# Altium PCB 2TO2.54_converter.PcbDoc
Units mm, origin at the board's own origin, x right, y up, seen from the top; angles counter-clockwise.
Board outline 10.54 x 16.13 mm, 2 copper layers (Top Layer, Bottom Layer); 2 components, 10 nets, 20 pads, 0 vias.
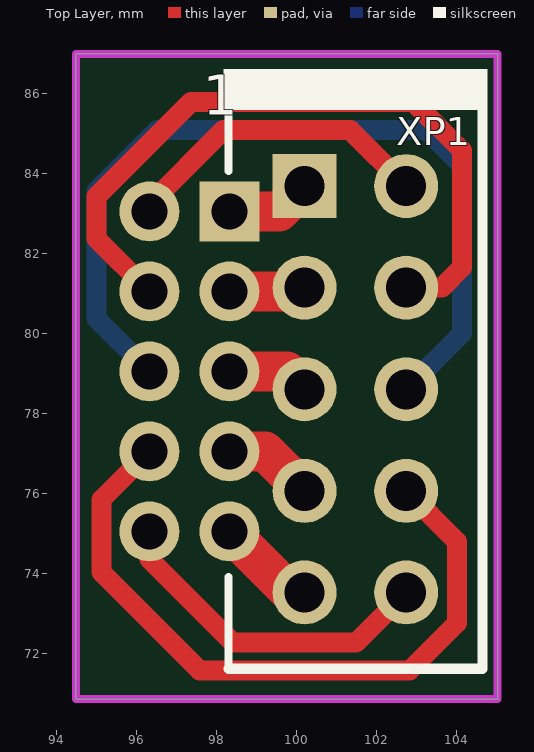
[diagram p0: Top Layer view]
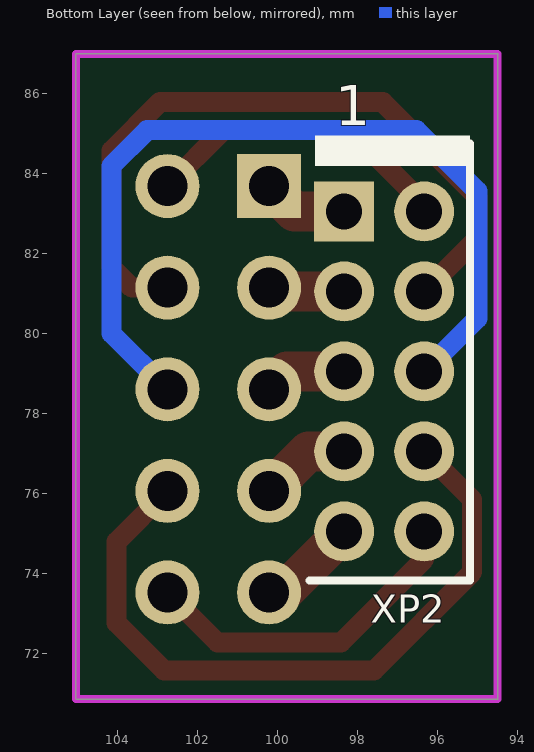
[diagram p1: Bottom Layer view, seen from below]

## Layer stack, top to bottom
Top Solder: solder mask 0.0102, Solder Resist, Dk 3.5
Top Layer: signal copper 0.0356
Dielectric 1: dielectric 0.32, FR-4, Dk 4.8
Bottom Layer: signal copper 0.0356
Bottom Solder: solder mask 0.0102, Solder Resist, Dk 3.5

## Board outline
94.488,70.866 94.488,86.995 105.029,86.995 105.029,70.866

## Design rules (kind name [scope] priority, off if disabled: settings)
Clearance [All] p1: gap=0.2
PolygonConnect [All] p1: connectstyle=Relief reliefconductorwidth=0.3 reliefentries=4 polygonreliefangle="90 Angle" airgapwidth=0.2
RoutingVias [All] p1: holewidth=0.711 width=1.27 viastyle="Through Hole" minholewidth=0.711 minwidth=1.27 maxholewidth=0.711 maxwidth=1.27
SolderMaskExpansion [All] p1: expansion=0.102
Width [All] p1: maxlimit=3 minlimit=0.2 preferedwidth=0.5
30 further rules are at their usual default settings.

## Components (designator, comment, footprint, x,y, rotation, side; value= is the part's Value field where it differs from the comment)
XP1 "PLD10" PIN10M 100.203,83.693 r270 top
XP2 "BLD2-10" PLD2-10 98.298,83.058 r180 bottom

## Footprints (in the part's own frame and the unit in brackets; to place one, negate y for a bottom-side part, rotate by r counter-clockwise, add the part's x,y. Pads: shape width x height; smd on the part's side, far side on the other; paste and mask are expansions set on the pad)
PIN10M [mm]
  rect 1.6x1.6 hole 1: 1(0,0)
  round 1.6 hole 1: 2(0,2.54) 3(2.54,0) 4(2.54,2.54) 5(5.08,0) 6(5.08,2.54) 7(7.62,0) 8(7.62,2.54) 9(10.16,0) 10(10.16,2.54)
  silkscreen extent -2.16,-1.91 12.06,4.45
PLD2-10 [mm]
  rect 1.5x1.5 hole 0.9: 1(-0.025,0)
  round 1.5 hole 0.9: 2(1.975,0) 3(-0.025,-2) 4(1.975,-2) 5(-0.025,-4) 6(1.975,-4) 7(-0.025,-6) 8(1.975,-6) 9(-0.025,-8) 10(1.975,-8)
  silkscreen extent -0.89,-9.23 3.13,1.2

## Part data
XP2: library part PLD2-10

## Nets (pads, with @x,y where several pads share a name; then routed paths per layer and width w, separated by ;. In a path a pad name is that pad's centre, name@x,y a point inside that pad or via, vN(x,y) a via of type N, cw(c..) or ccw(c..) an arc to the next point about the centre after c; other vN are vias at no path point)
NetXP1_1: XP1.1 XP2.1 | length 2.1
  Top Layer w1: XP2.1 99.568,83.058 XP1.1
NetXP1_2: XP1.2 XP2.2 | length 7.9
  Top Layer w0.5: XP2.2 96.323,83.242 98.171,85.09 101.346,85.09 XP1.2
NetXP1_3: XP1.3 XP2.3 | length 1.9
  Top Layer w1: XP2.3 100.108,81.058 XP1.3
NetXP1_4: XP1.4 XP2.4 | length 18.1
  Top Layer w0.5: XP2.4 94.996,82.385 94.996,83.428 97.358,85.79 102.932,85.79 104.14,84.582 104.14,81.661 103.632,81.153 XP1.4
NetXP1_5: XP1.5 XP2.5 | length 2.1
  Top Layer w1: XP2.5 99.758,79.058 XP1.5
NetXP1_6: XP1.6 XP2.6 | length 21.4
  Bottom Layer w0.5: XP2.6 94.996,80.385 94.996,83.566 96.52,85.09 103.251,85.09 104.14,84.201 104.14,80.01 XP1.6
NetXP1_7: XP1.7 XP2.7 | length 2.3
  Top Layer w1: XP2.7 99.218,77.058 XP1.7
NetXP1_8: XP1.8 XP2.8 | length 17.7
  Top Layer w0.5: XP2.8 95.123,75.858 95.123,74.041 97.581,71.583 102.825,71.583 104.013,72.771 104.013,74.803 XP1.8
NetXP1_9: XP1.9 XP2.9 | length 2.5
  Top Layer w1: XP2.9 99.848,73.533 XP1.9
NetXP1_10: XP1.10 XP2.10 | length 8.5
  Top Layer w0.5: XP2.10 96.323,74.365 98.405,72.283 101.493,72.283 XP1.10

## Keep-outs
Keep-Out Layer:
  lines w0.2: 94.488,70.866 94.488,82.423 94.488,86.995 105.029,86.995 105.029,70.866 94.488,70.866

## Silkscreen, mask and mechanical layers (free items; w line width, h text height)
Top Overlay:
  rectangle: 98.171,85.598 104.775,86.614
  lines w0.2: 98.298,71.628 98.298,73.914 ; 98.298,84.074 98.298,85.852
  text "1" at 97.663,85.471 h1
Bottom Overlay:
  rectangle: 95.173,84.201 99.06,84.963
  lines w0.2: 95.173,84.258 95.173,84.759
  text "1" at 98.552,85.217 h1